# Altium PCB AT32.PcbDoc (part 1 of 9)
Units mm, origin at the board's own origin, x right, y up, seen from the top; angles counter-clockwise.
Board outline 152.1 x 84.6 mm, 2 copper layers (Top Layer, Bottom Layer); 49 components, 58 nets, 223 pads, 0 vias.
Unrouted connection lines stored in the file: 3.
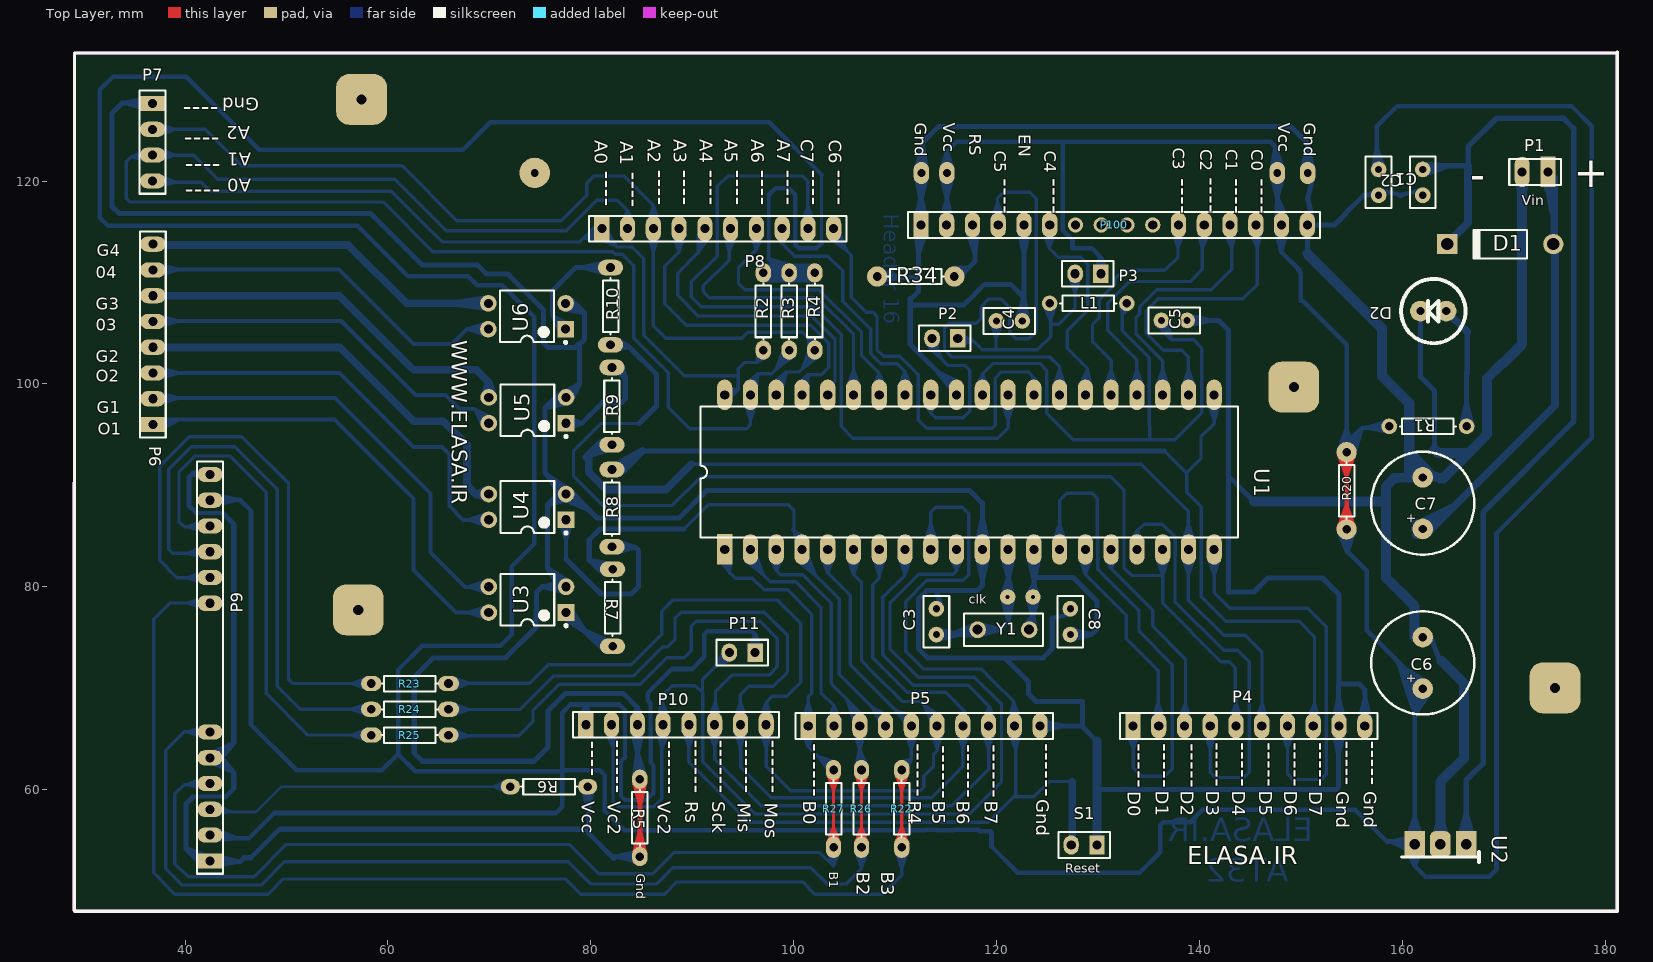
[diagram p0: Top Layer view]
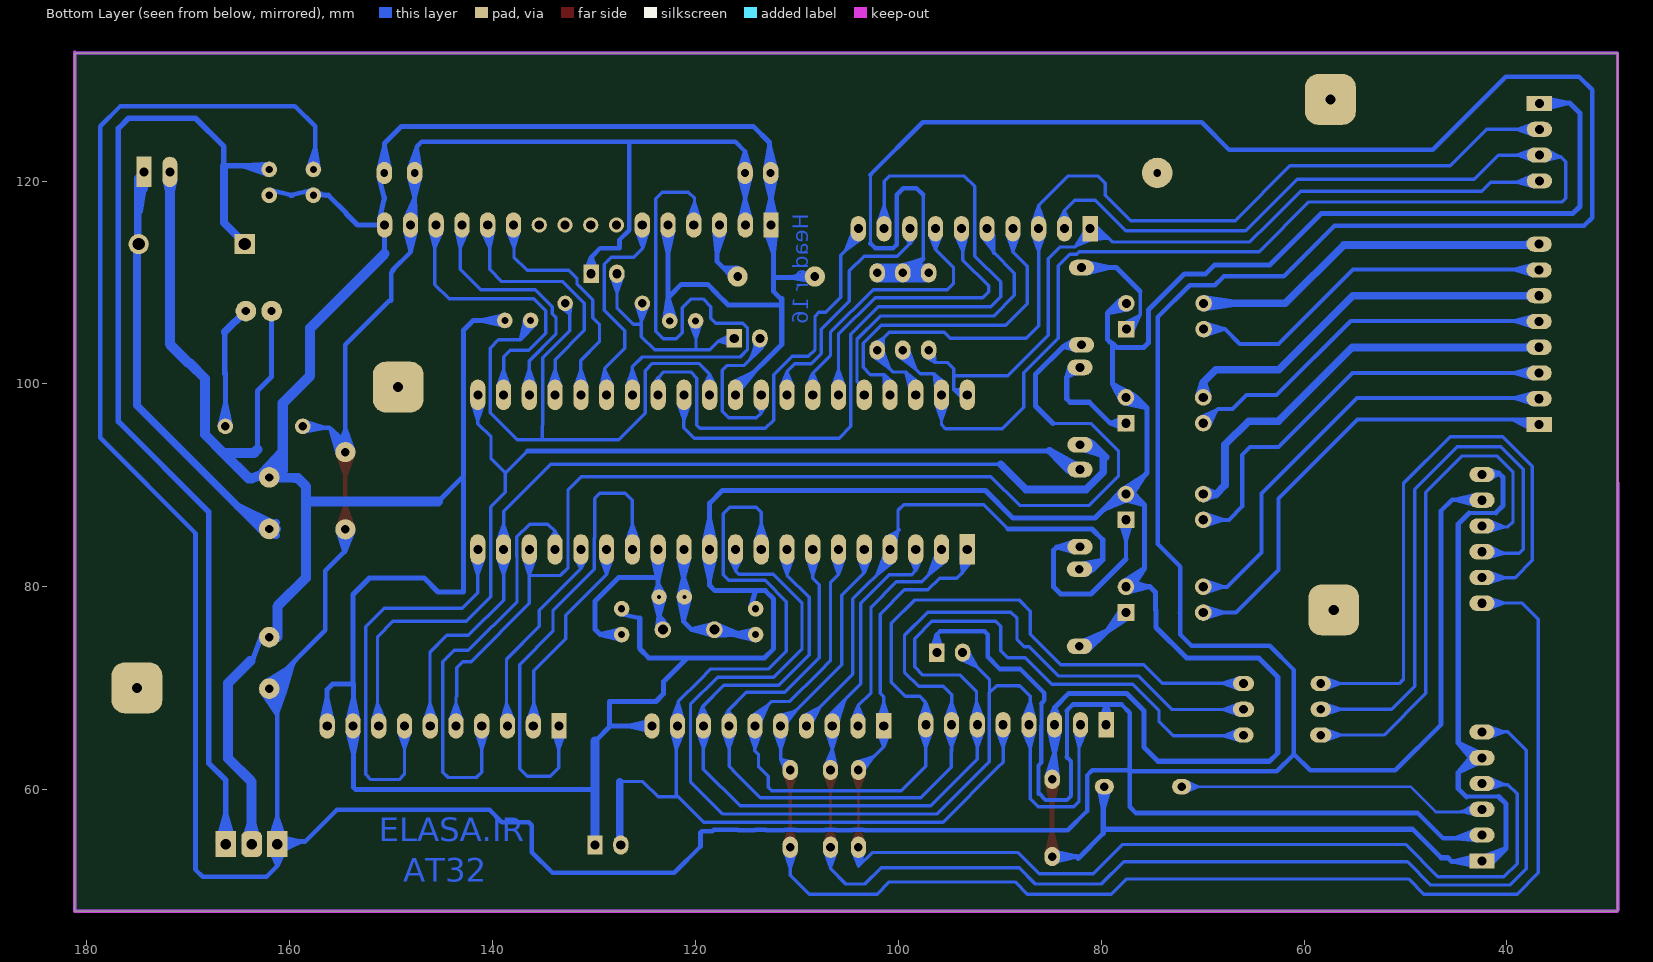
[diagram p1: Bottom Layer view, seen from below]

## Layer stack, top to bottom
Top Layer: signal copper 0.0356
Dielectric: core 0.32, FR-4, Dk 4.8
Bottom Layer: signal copper 0.0356

## Board outline
181.1,132.6 181.2,132.5 181.2,48 29.2,48 29.1,48.1 29.1,132.6 181.1,132.6

## Design rules (kind name [scope] priority, off if disabled: settings)
Clearance [All] p1: gap=0.27
PolygonConnect [All] p1: connectstyle=Relief reliefconductorwidth=0.254 reliefentries=4 polygonreliefangle="90 Angle"
RoomDefinition AT32 [InComponentClass('AT32')] p1: confinementstyle=ConfineIn formatcopy=TRUE lockcomponents=FALSE outline 0,23 50.8,23 50.8,38.1 0,38.1
RoutingLayers [All] p1: top layer_v5=FALSE bottom layer_v5=TRUE
RoutingVias [All] p1: holewidth=0.711 width=1.5 viastyle="Through Hole" minholewidth=0.711 minwidth=1 maxholewidth=0.711 maxwidth=5
SilkscreenOverComponentPads [All] p1: minsilkscreentomaskgap=0.254
SolderMaskExpansion [All] p1: expansion=0.102
Width [InNet('GND')] p1: maxlimit=1 minlimit=0.3 preferedwidth=0.5
26 further rules are at their usual default settings.

## Components (designator, comment, footprint, x,y, rotation, side; value= is the part's Value field where it differs from the comment)
C1 "Cap" RAD-0.1 157.672,119.876 r90 top
C2 "Cap" RAD-0.1 162.028,119.876 r90 top
C3 "Cap" RAD-0.1 114.076,76.565 r90 top
C4 "Cap" RAD-0.1 121.268,106.212 r0 top
C5 "Cap" RAD-0.1 137.524,106.26 r180 top
C6 "Cap Pol1" CE10 162.028,72.496 r90 top
C7 "Cap Pol1" CE10 162.028,88.244 r90 top
C8 "Cap" RAD-0.1 127.284,76.565 r90 top
D1 "Diode 1N4007" DIO10.46-5.3x2.8 169.672,113.792 r180 top
D2 "LED0" LED5 163.068,107.188 r180 top
L1 "Inductor" AXIAL-0.3#1 129.047,107.944 r0 top
P1 "Header 2" HDR1X2#1 174.368,120.908 r180 top
P2 "Header 2" HDR1X2#2 116.188,104.499 r180 top
P3 "Header 2" HDR1X2#2 130.29,110.865 r180 top
P4 "Header 10" HDR1X10 133.456,66.286 r0 top
P5 "Header 10" HDR1X10 101.446,66.286 r0 top
P6 "Header 8" HDR1X8 36.827,96.004 r90 top
P7 "Header 4" HDR1X4 36.8,127.644 r270 top
P8 "Header 10" HDR1X10 81.091,115.31 r0 top
P9 "Header 16" HDR1X16#1 42.46,52.98 r90 top
P10 "Header 8" HDR1X8 79.515,66.406 r0 top
P11 "Header 2" HDR1X2#2 96.204,73.512 r180 top
P100 "Header 16" HDR1X16#2 112.552,115.676 r0 top
R1 "Res1" AXIAL-0.3#1 162.539,95.815 r180 top
R2 "Res1" AXIAL-0.3#2 97.016,107.147 r90 top
R3 "Res1" AXIAL-0.3#2 99.556,107.147 r90 top
R4 "Res1" AXIAL-0.3#2 102.096,107.147 r90 top
R5 "Res1" AXIAL-0.3#2 84.844,57.212 r270 top
R6 "Res1" AXIAL-0.3#2 75.884,60.304 r0 top
R7 "Res1" AXIAL-0.3#3 82.152,77.936 r90 top
R8 "Res1" AXIAL-0.3#3 82.092,87.756 r270 top
R9 "Res1" AXIAL-0.3#3 82.092,97.816 r90 top
R10 "Res1" AXIAL-0.3#3 81.952,107.668 r90 top
R20 "Res1" AXIAL-0.3#4 154.519,89.475 r90 top
R22 "Res1" AXIAL-0.3#5 110.66,58.128 r90 top
R23 "Res1" AXIAL-0.3#5 62.168,70.464 r180 top
R24 "Res1" AXIAL-0.3#5 62.168,67.924 r180 top
R25 "Res1" AXIAL-0.3#5 62.168,65.384 r0 top
R26 "Res1" AXIAL-0.3#5 106.688,58.128 r90 top
R27 "Res1" AXIAL-0.3#5 103.94,58.128 r90 top
R34 "Res1" AXIAL-0.3#4 112.044,110.596 r180 top
S1 "SW-PB" HDR1X2#3 129.908,54.548 r180 top
U1 "ATmega32L-8PI" 40P6 117.336,91.307 r0 top
U2 "LM78M05CT" LM78XX 163.768,54.632 r180 top
U3 "Optoisolator1" DIP-4 73.752,78.734 r180 top
U4 "Optoisolator1" DIP-4 73.752,87.878 r180 top
U5 "Optoisolator1" DIP-4 73.752,97.403 r180 top
U6 "Optoisolator1" DIP-4 73.712,106.674 r180 top
Y1 "XTAL" CAPR5.08-7.8x3.2 120.68,75.776 r0 top

## Footprints (in the part's own frame and the unit in brackets; to place one, negate y for a bottom-side part, rotate by r counter-clockwise, add the part's x,y. Pads: shape width x height; smd on the part's side, far side on the other; paste and mask are expansions set on the pad)
40P6 [mm] "DIP; 40 Leads; Row Spacing 15.24 mm; Pitch 2.54 mm"
  rect 1.5x3 hole 0.9: 1(-24.13,-7.62)
  oval 1.5x3 hole 0.9: 2(-21.59,-7.62) 3(-19.05,-7.62) 4(-16.51,-7.62) 5(-13.97,-7.62) 6(-11.43,-7.62) 7(-8.89,-7.62) 8(-6.35,-7.62) 9(-3.81,-7.62) 10(-1.27,-7.62) 11(1.27,-7.62) 12(3.81,-7.62) 13(6.35,-7.62) 14(8.89,-7.62) 15(11.43,-7.62) 16(13.97,-7.62) 17(16.51,-7.62) 18(19.05,-7.62) 19(21.59,-7.62) 20(24.13,-7.62) 21(24.13,7.62) 22(21.59,7.62) 23(19.05,7.62) 24(16.51,7.62) 25(13.97,7.62) 26(11.43,7.62) 27(8.89,7.62) 28(6.35,7.62) 29(3.81,7.62) 30(1.27,7.62) 31(-1.27,7.62) 32(-3.81,7.62) 33(-6.35,7.62) 34(-8.89,7.62) 35(-11.43,7.62) 36(-13.97,7.62) 37(-16.51,7.62) 38(-19.05,7.62) 39(-21.59,7.62) 40(-24.13,7.62)
  silkscreen extent -26.5,-6.45 26.5,6.45
AXIAL-0.3#1 [mm]
  round 1.54 hole 0.85: 1(-3.81,0) 2(3.81,0)
  silkscreen extent -2.77,-0.76 2.77,0.76
AXIAL-0.3#2 [mm] "Axial Device, Thru-Hole; 2 Leads; 0.3 in Pin Spacing"
  oval 1.9x1.54 hole 0.85: 1(-3.81,0) 2(3.81,0)
  silkscreen extent -2.77,-0.76 2.77,0.76
AXIAL-0.3#3 [mm] "Axial Device, Thru-Hole; 2 Leads; 0.3 in Pin Spacing"
  oval 1.54x2.5 hole 0.85: 1(-3.81,0) 2(3.81,0)
  silkscreen extent -2.77,-0.76 2.77,0.76
AXIAL-0.3#4 [mm] "Axial Device, Thru-Hole; 2 Leads; 0.3 in Pin Spacing"
  round 2 hole 0.85: 1(-3.81,0) 2(3.81,0)
  silkscreen extent -2.77,-0.76 2.77,0.76
AXIAL-0.3#5 [mm] "Axial Device, Thru-Hole; 2 Leads; 0.3 in Pin Spacing"
  oval 2.1x1.5 hole 0.85: 1(-3.81,0)
  oval 2x1.5 hole 0.85: 2(3.81,0)
  silkscreen extent -2.77,-0.76 2.77,0.76
CAPR5.08-7.8x3.2 [mm] "Capacitor, Ceramic, Thru-Hole, Dipped Radial; Body 7.8 x 3.2 mm (WxT) Pin Spacing 5.08 mm (typ)"
  round 1.65 hole 1: 1(-2.54,0) 2(2.54,0)
  silkscreen extent -3.9,-1.6 3.9,1.6
CE10 [mil]
  round 80 hole 32: 1(-100,0) 2(100,0)
  silkscreen extent -200,-200 200,200
DIO10.46-5.3x2.8 [mm] "Diode, Axial; Body 5.2 x 2.7 mm (LxDia. max), Lead Dia. 0.86 mm (max)"
  round 2 hole 1.2: 1(-5.23,0)
  rect 2x2 hole 1.2: 2(5.23,0)
  silkscreen extent -2.65,-1.41 2.74,1.4
DIP-4 [mm] "DIP; 4 Leads; Row Spacing 7.62 mm; Pitch 2.54 mm"
  rect 1.64x1.64 hole 0.9: 1(-3.81,1.27)
  round 1.64 hole 0.9: 2(-3.81,-1.27) 3(3.81,-1.27) 4(3.81,1.27)
  silkscreen extent -3.94,-2.55 2.65,2.69
HDR1X2#1 [mm] "Connector; Header; 2 Position"
  rect 1.5x3 hole 0.9: 1(0,0)
  oval 1.5x3 hole 0.9: 2(2.54,0)
  silkscreen extent -1.27,-1.27 3.81,1.27
HDR1X2#2 [mm] "Connector; Header; 2 Position"
  rect 1.54x1.8 hole 0.9: 1(0,0)
  oval 1.54x1.8 hole 0.9: 2(2.54,0)
  silkscreen extent -1.27,-1.27 3.81,1.27
HDR1X2#3 [mm]
  rect 1.5x1.9 hole 0.9: 1(0,0)
  oval 1.5x1.9 hole 0.9: 2(2.54,0)
  silkscreen extent -1.27,-1.27 3.81,1.27
HDR1X4 [mm] "Connector; Header; 4 Position"
  rect 1.5x2.5 hole 0.9: 1(0,0)
  oval 1.5x2.5 hole 0.9: 2(2.54,0) 3(5.08,0) 4(7.62,0)
  silkscreen extent -1.27,-1.27 8.89,1.27
HDR1X8 [mm] "Connector; Header; 8 Position"
  rect 1.5x2.5 hole 0.9: 1(0,0)
  oval 1.5x2.5 hole 0.9: 2(2.54,0) 3(5.08,0) 4(7.62,0) 5(10.16,0) 6(12.7,0) 7(15.24,0) 8(17.78,0)
  silkscreen extent -1.27,-1.27 19.05,1.27
HDR1X10 [mm] "Connector; Header; 10 Position"
  rect 1.5x2.5 hole 0.9: 1(0,0)
  oval 1.5x2.5 hole 0.9: 2(2.54,0) 3(5.08,0) 4(7.62,0) 5(10.16,0) 6(12.7,0) 7(15.24,0) 8(17.78,0) 9(20.32,0) 10(22.86,0)
  silkscreen extent -1.27,-1.27 24.13,1.27
HDR1X16#1 [mm] "Connector; Header; 16 Position"
  rect 1.5x2.5 hole 0.9: 1(0,0)
  oval 1.5x2.5 hole 0.9: 2(2.54,0) 3(5.08,0) 4(7.62,0) 5(10.16,0) 6(12.7,0) 11(25.4,0) 12(27.94,0) 13(30.48,0) 14(33.02,0) 15(35.56,0) 16(38.1,0)
  round 0 all layers, no hole: 7(15.24,0) 8(17.78,0) 9(20.32,0) 10(22.86,0)
  silkscreen extent -1.27,-1.27 39.37,1.27
HDR1X16#2 [mm] "Connector; Header; 16 Position"
  rect 1.5x2.5 hole 0.9: 1(0,0)
  oval 1.5x2.5 hole 0.9: 2(2.54,0) 3(5.08,0) 4(7.62,0) 5(10.16,0) 6(12.7,0) 11(25.4,0) 12(27.94,0) 13(30.48,0) 14(33.02,0) 15(35.56,0) 16(38.1,0)
  round 1.5 hole 0.9: 7(15.24,0) 8(17.78,0) 9(20.32,0) 10(22.86,0)
  silkscreen extent -1.27,-1.27 39.37,1.27
LED5 [mil]
  round 80 hole 32: 1(-50,0) 2(50,0)
  silkscreen extent -125,-125 125,125
LM78XX [mil]
  rect 80x100 hole 40: 1(-100,0) 3(100,0)
  rrect50% 80x100 hole 40: 2(0,0)
  silkscreen extent -150,30 150,70
RAD-0.1 [mm]
  round 1.54 hole 0.7: 1(-1.27,0) 2(1.27,0)
  silkscreen extent -2.54,-1.27 2.54,1.27

## Part data
C1 C2 C3 C4 C5 C8: "Capacitor"
C6 C7: "Polarized Capacitor (Radial)"
D1: "1 Amp General Purpose Rectifier"
D2: "Typical INFRARED GaAs LED"
P1 P2 P3 P11: "Header, 2-Pin"
P4 P5 P8: "Header, 10-Pin"
P6 P10: "Header, 8-Pin"
P7: "Header, 4-Pin"
P9 P100: "Header, 16-Pin"
R1 R2 R3 R4 R5 R6 R7 R8 R9 R10 R20 R22 R23 R24 R25 R26 R27 R34: "Resistor"
S1: "Switch"
U1: "8-Bit AVR Microcontroller with 32K Bytes of In-System Programmable Flash Memory"
U2: "3-Terminal Positive Voltage Regulators"
U3 U4 U5 U6: "4-Pin Phototransistor Optocoupler"
Y1: "Crystal Oscillator"

## Free pads (board coordinates)
  round 3 hole 0.762 paste+0: 0(74.475,120.808)
  round 1.524 hole 0.4: 0(121.1,79) 1(123.6,79)
  oval 1.524x2.2 hole 0.762: 0(150.68,120.8) 1(147.697,120.8) 9(115.12,120.8) 10(112.6,120.8)
  round 0.1 all layers, no hole paste+0: 0(181.2,83.8)
  rrect50% 5x5 hole 1: 2(57.073,77.715) 2(57.403,128.052) 2(149.32,99.695) 2(175.07,70.033)

## Nets (pads, with @x,y where several pads share a name; then routed paths per layer and width w, separated by ;. In a path a pad name is that pad's centre, name@x,y a point inside that pad or via, vN(x,y) a via of type N, cw(c..) or ccw(c..) an arc to the next point about the centre after c; other vN are vias at no path point)
GND: C1.1 C2.1 C3.2 C4.2 C5.1 C6.2 C7.2 C8.2 D2.2 P1.2 P4.9 P4.10 P5.10 P7.1 P9.1 P9.5 P9.16 P10.3 P100.1 P100.5 P100.16 pad.0@150.68,120.8 pad.10 R5.1 R5.2 R6.2 R34.2 S1.1 U1.11 U1.31 U2.2 U3.2 U4.2 U5.2 U6.2 | length 2147.9
  Top Layer w0.5: R5.2@84.476,53.95 ccw(c83.589,54.837) 84.844,54.837 ccw(c86.099,54.837) R5.2@85.212,53.95 ; R5.1@84.476,60.474 cw(c83.589,59.587) 84.844,59.587 cw(c86.099,59.587) R5.1@85.212,60.474 ; R5.2@84.844,53.444 R5.1@84.844,61.022 ; R5.2@84.327,53.642 84.844,55.852 ; R5.2@84.327,53.642 84.844,55.852 ; R5.2@84.327,53.642 84.844,55.852 ; R5.2@84.327,53.642 84.844,55.852 ; R5.2@84.327,53.642 84.844,55.852 ; R5.1@84.327,60.782 84.844,58.572 ; R5.1@84.327,60.782 84.844,58.572 ; R5.1@84.327,60.782 84.844,58.572 ; R5.1@84.327,60.782 84.844,58.572 ; R5.1@84.327,60.782 84.844,58.572 ; R5.2@84.844,53.582 84.844,55.852 ; R5.2@84.844,53.582 84.844,55.852 ; R5.2@84.844,53.582 84.844,55.852 ; R5.2@84.844,53.582 84.844,55.852 ; R5.2@84.844,53.582 84.844,55.852 ; 84.844,55.852 R5.2@85.361,53.642 ; 84.844,55.852 R5.2@85.361,53.642 ; 84.844,55.852 R5.2@85.361,53.642 ; 84.844,55.852 R5.2@85.361,53.642 ; 84.844,55.852 R5.2@85.361,53.642 ; 84.844,58.572 R5.1@85.361,60.782 ; 84.844,58.572 R5.1@84.844,60.842 ; 84.844,58.572 R5.1@85.361,60.782 ; 84.844,58.572 R5.1@84.844,60.842 ; 84.844,58.572 R5.1@85.361,60.782 ; 84.844,58.572 R5.1@84.844,60.842 ; 84.844,58.572 R5.1@85.361,60.782 ; 84.844,58.572 R5.1@84.844,60.842 ; 84.844,58.572 R5.1@85.361,60.782 ; 84.844,58.572 R5.1@84.844,60.842
  Bottom Layer w0.4: 40.824,59.33 43.83,59.33 ; 41.1,87.3 41.104,87.3 ; 41.134,87.27 43.73,87.27
  Bottom Layer w0.5: 34.958,127.7 cw(c34.958,126.302) P7.1@35.946,127.29 ; 35.228,127.7 ccw(c35.228,128.716) P7.1@35.946,127.998 ; P7.1@36.8,127.7 33.8,127.7 32.8,126.7 32.8,117.5 33.5,116.8 58.3,116.8 63.354,111.746 68.815,111.746 69.704,110.857 71.803,110.857 75.36,107.3 75.36,104.04 75.8,103.6 78.5,103.6 78.901,104.001 78.901,100.012 ; 40.42,53.88 ccw(c41.508,54.968) P9.1@41.849,53.468 ; 40.824,59.33 40.1,58.606 40.1,54.2 ; 41.043,91.2 ccw(c41.043,91.997) P9.16@41.606,91.434 ; 41.06,53.24 ccw(c41.745,53.924) P9.1@41.96,52.98 ; 41.1,87.3 40.4,88 40.4,90.8 40.8,91.2 ; P9.16@41.544,90.802 ccw(c40.8,90.305) 40.8,91.2 ; P9.5@42.1,63.2 P9.5@42.16,63.14 ; P9.16@42.2,91.2 40.8,91.2 ; P9.1@42.3,52.9 P9.1@42.4,52.9 ; P9.5@42.612,63.1 42.2,63.1 P9.5@42.16,63.14 ; P9.5@42.612,63.14 P9.5@42.46,63.14 ; P9.5@42.96,62.64 cw(c42.96,60.467) 44.496,62.004 ; P9.5@42.96,63.64 ccw(c42.96,65.765) 44.462,64.262 ; P9.1@43.314,52.626 cw(c43.974,51.966) 43.974,52.9 ; P9.1@43.314,53.334 ccw(c44.36,54.38) 44.36,52.9 ; P9.5@43.35,63.15 44.8,64.6 ; 43.73,87.27 44.8,86.2 44.8,64.6 ; 44,59.3 44.8,60.1 44.8,61.7 ; 74.6,77.7 74.6,76 71.6,73 64.5,73 62.6,71.1 62.6,63.6 63.4,62.8 74.4,62.8 75.8,64.2 75.8,67.8 77.5,69.5 83.2,69.5 84.595,68.105 ; 74.662,77.7 74.662,79.462 75.204,80.004 U3.2@77.562,80.004 ; 75.768,97.908 cw(c77.452,96.223) U5.2@77.559,98.603 ; 76.019,98.159 cw(c76.651,97.526) U5.2@77.208,98.227 ; 76.178,88.518 cw(c77.531,87.165) 77.561,89.078 cw(c77.562,87.243) 78.859,88.541 ; 76.415,98.555 cw(c77.002,97.968) U5.2@77.518,98.618 ; 76.57,98.71 cw(c77.521,97.759) U5.2@77.581,99.103 ; U3.2@76.992,80.004 ccw(c75.616,80.004) 76.589,80.977 ccw(c77.562,81.95) U3.2@77.562,80.574 ; U4.2@76.992,89.148 ccw(c75.616,89.148) 76.589,90.121 ccw(c77.562,91.094) U4.2@77.562,89.718 ; U5.2@77.079,98.371 ccw(c76.533,98.029) 76.533,98.673 ; U5.2@77.079,98.975 cw(c76.533,99.317) 76.533,98.673 ; U3.2@77.159,79.601 ccw(c76.186,78.628) 76.186,80.004 ccw(c76.186,81.38) U3.2@77.159,80.407 ; U4.2@77.286,88.649 79.684,87.65 ; U4.2@77.294,88.645 79.616,87.728 U4.2@77.938,89.577 ; U4.2@77.296,88.644 79.713,87.692 ; U4.2@77.458,89.113 77.547,89.024 78.376,89.024 80.608,86.792 88.717,86.792 91.411,89.486 117.357,89.486 118.606,88.237 U1.11@118.606,83.687 118.606,80.133 118.098,79.624 114.1,79.624 ; U6.2@77.487,108.373 cw(c77.576,107.294) 78.341,108.059 ; U6.2@77.528,107.874 cw(c77.692,105.884) 79.104,107.296 ; U4.2@77.562,88.578 cw(c77.562,85.536) 79.713,87.687 ; U5.2@77.562,99.243 ccw(c77.562,100.619) 78.535,99.646 ccw(c79.508,98.673) U5.2@78.132,98.673 ; U6.2@77.562,107.944 78.456,107.944 ; U6.2@77.568,107.891 cw(c78.037,107.35) 78.543,107.857 ; U6.2@77.896,107.513 cw(c78.39,106.944) 78.923,107.477 ; U4.2@77.931,89.582 79.713,87.692 ; U4.2@77.94,89.575 79.684,87.65 ; U6.2@78.029,107.683 cw(c78.456,107.464) 78.456,107.944 ; U6.2@78.029,108.205 ccw(c78.456,108.424) 78.456,107.944 ; 79.09,104.09 79.4,104.4 79.4,107 ; R6.2@79.506,59.936 cw(c78.797,59.227) 79.8,59.227 ; 79.8,58.87 cw(c81.308,58.87) R6.2@80.242,59.936 ; R6.2@79.8,60.26 79.8,56.1 ; 82.3,53.2 79.8,55.7 79.8,56.1 ; 82.402,53.402 R5.2@84.844,53.402 ; P10.3@84.241,65.552 cw(c83.388,64.699) 84.595,64.699 cw(c85.802,64.699) P10.3@84.949,65.552 ; P10.3@84.243,67.261 ccw(c83.408,68.105) 84.595,68.105 ; R5.1@84.324,61.206 84.6,63.465 ; R5.2@84.476,53.034 ccw(c83.589,52.147) 83.589,53.402 ccw(c83.589,54.657) R5.2@84.476,53.77 ; 84.595,63.059 ccw(c86.701,63.059) R5.1@85.212,61.57 ; P10.3@84.947,67.261 cw(c85.782,68.105) 84.595,68.105 ; R5.1@85,61.1 84.595,61.505 P10.3@84.595,66.406 84.595,68.105 ; R5.1@85.351,61.316 84.6,63.465 ; R34.2@108.2,110.5 112.3,110.5 ; 111.5,107.6 111.5,108.3 ; 111.5,108.4 111.5,108.3 ; P100.1@112.198,116.53 ccw(c111.277,117.451) 112.58,117.451 ; pad.10@112.238,120.1 cw(c111.412,119.274) 112.58,119.274 ; P100.1@112.5,115.6 112.3,115.4 112.3,110.5 ; P100.1@112.58,115.31 pad.10@112.58,120.8 ; 112.58,117.316 ccw(c113.692,117.316) P100.1@112.906,116.53 ; 112.58,119.178 cw(c113.884,119.178) pad.10@112.962,120.1 ; pad.10@112.6,120.8 112.7,120.9 112.7,123.8 114.3,125.4 149,125.4 150.68,123.72 pad.0@150.68,120.8 ; P100.1@113.04,115.066 112.303,112.931 ; C3.2@114.591,77.903 114.1,79.624 ; 114.627,100.773 ccw(c116.066,102.212) U1.31@116.066,100.177 ; U1.31@115.713,99.323 114.369,101.013 ; U1.31@116.066,98.927 116.066,99.867 115.533,99.867 111.502,103.898 111.502,107.8 116.8,107.8 117.9,108.9 117.9,108.92 118.8,109.82 121.4,109.82 122.52,108.7 ; U1.31@116.328,100.103 114.369,101.013 ; U1.11@118.252,82.583 cw(c117.399,81.73) 118.606,81.73 cw(c119.813,81.73) U1.11@118.96,82.583 ; U1.11@118.252,84.791 ccw(c117.399,85.644) 118.606,85.644 ccw(c119.813,85.644) U1.11@118.96,84.791 ; C4.2@122.027,106.31 122.71,108.478 C4.2@123.058,106.232 ; C4.2@122.17,106.58 ccw(c120.863,107.887) 122.712,107.887 ; P100.5@122.358,114.822 cw(c121.505,113.969) 122.712,113.969 cw(c123.919,113.969) P100.5@123.066,114.822 ; C4.2@122.5,106.2 C4.2@122.525,106.225 ; C4.2@122.52,106.23 C4.2@122.525,106.225 ; 122.712,107.047 ccw(c123.373,107.047) C4.2@122.906,106.58 ; P100.5@122.712,115.676 122.712,106.412 C4.2@122.525,106.225 ; 123.15,69.45 123.15,70.65 120.8,73 ; 123.2,69.4 123.9,68.7 128.5,68.7 128.5,66.386 ; P5.10@124.6,66.58 P5.10@124.306,66.286 ; P5.10@124.66,65.933 cw(c125.513,65.079) 125.513,66.286 cw(c125.513,67.493) P5.10@124.66,66.64 ; 125.48,73.868 124.612,73 120.8,73 ; 125.5,74 125.5,76.9 C8.2@127.464,77.347 ; 129.9,64.786 128.4,66.286 P5.10@124.306,66.286 ; 130.008,60 153.5,60 153.74,60.24 153.74,70.4 ; C5.1@139.162,105.892 cw(c140.049,105.005) 140.049,106.26 cw(c140.049,107.515) C5.1@139.162,106.628 ; 142.876,90.574 142.876,79.5 145.4,79.5 146.76,80.86 152.149,80.86 153.776,79.233 153.776,70.4 155.8,70.4 156.316,69.884 P4.10@156.316,66.842 ; 142.876,90.9 142.876,105.295 141.911,106.26 C5.1@138.794,106.26 ; 143.051,90.749 145.4,88.4 ; pad.0@150.318,121.5 ccw(c149.444,122.374) 150.68,122.374 ccw(c151.916,122.374) pad.0@151.042,121.5 ; 150.652,112.926 P100.16@150.652,115.176 ; P100.16@150.68,115.676 153.339,115.676 154.468,116.805 ; 150.68,118.2 pad.0@151.189,120.404 ; 150.68,118.426 P100.16@151.15,116.225 ; P4.9@153.422,65.432 cw(c152.656,64.666) 153.74,64.666 ; P4.9@153.422,67.14 ccw(c152.656,67.906) 153.74,67.906 ; 153.74,64.492 cw(c155.07,64.492) P4.9@154.13,65.432 ; 153.74,68.08 ccw(c155.07,68.08) P4.9@154.13,67.14 ; 154.4,116.8 156.206,118.606 ; P4.10@155.962,67.14 ccw(c155.109,67.993) 156.316,67.993 ccw(c157.523,67.993) P4.10@156.67,67.14 ; 156.417,118.606 ccw(c156.417,119.861) C1.1@157.304,118.974 ; C1.1@157.732,119.123 159.942,118.606 ; 159.758,118.606 C2.1@161.968,119.123 ; D2.2@161.798,107.188 161.798,100.702 163.2,99.3 163.2,93.54 ; C6.2@162.702,75.4 163.683,72.777 ; U2.2@163.226,55.428 ccw(c161.919,56.735) 163.768,56.735 ccw(c165.617,56.735) U2.2@164.31,55.428 ; P1.2@171.474,119.804 cw(c170.621,118.951) 171.828,118.951 cw(c173.035,118.951) P1.2@172.182,119.804 ; 34.05,127.7 P7.1@36.232,127.149 ; 34.05,127.7 P7.1@36.257,128.142 ; 34.05,127.7 P7.1@36.3,127.644 ; 34.05,127.7 P7.1@36.232,127.149 ; 34.05,127.7 P7.1@36.257,128.142 ; 34.05,127.7 P7.1@36.3,127.644 ; 34.05,127.7 P7.1@36.232,127.149 ; 34.05,127.7 P7.1@36.257,128.142 ; 34.05,127.7 P7.1@36.3,127.644 ; 34.05,127.7 P7.1@36.232,127.149 ; 34.05,127.7 P7.1@36.257,128.142 ; 34.05,127.7 P7.1@36.3,127.644 ; 34.05,127.7 P7.1@36.232,127.149 ; 34.05,127.7 P7.1@36.257,128.142 ; 34.05,127.7 P7.1@36.3,127.644 ; 40.1,54.2 41.32,52.98 42.32,52.98 P9.1@42.4,52.9 ; 40.1,54.2 P9.1@41.641,52.595 ; 40.1,54.2 P9.1@42.186,53.426 ; 40.1,54.2 P9.1@41.96,52.98 ; 40.1,54.2 P9.1@41.641,52.595 ; 40.1,54.2 P9.1@42.186,53.426 ; 40.1,54.2 P9.1@41.96,52.98 ; 40.1,54.2 P9.1@41.641,52.595 ; 40.1,54.2 P9.1@42.186,53.426 ; 40.1,54.2 P9.1@41.96,52.98 ; 40.1,54.2 P9.1@41.641,52.595 ; 40.1,54.2 P9.1@42.186,53.426 ; 40.1,54.2 P9.1@41.96,52.98 ; 40.1,54.2 P9.1@41.641,52.595 ; 40.1,54.2 P9.1@42.186,53.426 ; 40.1,54.2 P9.1@41.96,52.98 ; 40.8,91.2 P9.16@41.803,90.605 ; 40.8,91.2 P9.16@41.904,91.577 ; 40.8,91.2 P9.16@41.96,91.08 ; 40.8,91.2 P9.16@41.803,90.605 ; 40.8,91.2 P9.16@41.904,91.577 ; 40.8,91.2 P9.16@41.96,91.08 ; 40.8,91.2 P9.16@41.803,90.605 ; 40.8,91.2 P9.16@41.904,91.577 ; 40.8,91.2 P9.16@41.96,91.08 ; 40.8,91.2 P9.16@41.803,90.605 ; 40.8,91.2 P9.16@41.904,91.577 ; 40.8,91.2 P9.16@41.96,91.08 ; 40.8,91.2 P9.16@41.803,90.605 ; 40.8,91.2 P9.16@41.904,91.577 ; 40.8,91.2 P9.16@41.96,91.08 ; P9.5@42.16,63.14 P9.5@42.46,63.14 ; P9.1@42.4,52.9 45.431,52.9 45.816,53.285 46.485,53.285 49.3,56.1 79.8,56.1 ; P9.5@42.46,63.14 43.36,63.14 44.8,61.7 ; P9.5@42.693,63.563 44.8,64.6 ; P9.5@42.693,63.563 44.8,64.6 ; P9.5@42.693,63.563 44.8,64.6 ; P9.5@42.693,63.563 44.8,64.6 ; P9.5@42.693,63.563 44.8,64.6 ; P9.5@42.696,62.716 44.8,61.7 ; P9.5@42.696,62.716 44.8,61.7 ; P9.5@42.696,62.716 44.8,61.7 ; P9.5@42.696,62.716 44.8,61.7 ; P9.5@42.696,62.716 44.8,61.7 ; P9.1@42.96,52.98 45.211,52.9 ; P9.1@42.96,52.98 45.211,52.9 ; P9.1@42.96,52.98 45.211,52.9 ; P9.1@42.96,52.98 45.211,52.9 ; P9.1@42.96,52.98 45.209,52.9 ; P9.5@42.96,63.14 44.8,64.6 ; P9.5@42.96,63.14 44.8,61.7 ; P9.5@42.96,63.14 44.8,64.6 ; P9.5@42.96,63.14 44.8,61.7 ; P9.5@42.96,63.14 44.8,64.6 ; P9.5@42.96,63.14 44.8,64.6 ; P9.5@42.96,63.14 44.8,64.6 ; P9.5@42.96,63.14 44.8,61.7 ; P9.5@42.96,63.14 44.8,61.7 ; P9.5@42.96,63.14 44.8,61.7 ; P9.1@42.998,52.481 45.211,52.9 ; P9.1@42.998,52.481 45.211,52.9 ; P9.1@42.998,52.481 45.211,52.9 ; P9.1@42.998,52.481 45.211,52.9 ; P9.1@42.998,52.481 45.209,52.9 ; P9.1@43.033,53.475 45.211,52.9 ; P9.1@43.033,53.475 45.211,52.9 ; P9.1@43.033,53.475 45.211,52.9 ; P9.1@43.033,53.475 45.211,52.9 ; P9.1@43.033,53.475 45.209,52.9 ; P9.5@43.309,63.499 44.8,61.7 ; P9.5@43.309,63.499 44.8,61.7 ; P9.5@43.309,63.499 44.8,61.7 ; P9.5@43.309,63.499 44.8,61.7 ; P9.5@43.309,63.499 44.8,61.7 ; P9.5@43.311,62.784 44.8,64.6 ; P9.5@43.311,62.784 44.8,64.6 ; P9.5@43.311,62.784 44.8,64.6 ; P9.5@43.311,62.784 44.8,64.6 ; P9.5@43.311,62.784 44.8,64.6 ; 75.242,80.004 U3.2@77.492,79.438 ; 75.242,80.004 U3.2@77.492,80.57 ; 75.242,80.004 U3.2@77.562,80.004 ; 75.242,80.004 U3.2@77.492,79.438 ; 75.242,80.004 U3.2@77.492,80.57 ; 75.242,80.004 U3.2@77.562,80.004 ; 75.242,80.004 U3.2@77.492,79.438 ; 75.242,80.004 U3.2@77.492,80.57 ; 75.242,80.004 U3.2@77.562,80.004 ; 75.242,80.004 U3.2@77.492,79.438 ; 75.242,80.004 U3.2@77.492,80.57 ; 75.242,80.004 U3.2@77.562,80.004 ; 75.242,80.004 U3.2@77.492,79.438 ; 75.242,80.004 U3.2@77.492,80.57 ; 75.242,80.004 U3.2@77.562,80.004 ; 75.48,97.62 76.533,98.673 ; 75.48,97.62 75.48,91.23 U4.2@77.562,89.148 ; 75.48,97.62 U5.2@77.755,98.137 ; 75.48,97.62 U5.2@77.245,99.146 ; 75.48,97.62 U5.2@77.562,98.673 ; 75.48,97.62 U5.2@77.755,98.137 ; 75.48,97.62 U5.2@77.245,99.146 ; 75.48,97.62 U5.2@77.562,98.673 ; 75.48,97.62 U5.2@77.755,98.137 ; 75.48,97.62 U5.2@77.245,99.146 ; 75.48,97.62 U5.2@77.562,98.673 ; 75.48,97.62 U5.2@77.755,98.137 ; 75.48,97.62 U5.2@77.245,99.146 ; 75.48,97.62 U5.2@77.562,98.673 ; 75.48,97.62 U5.2@77.755,98.137 ; 75.48,97.62 U5.2@77.245,99.146 ; 75.681,91.029 U4.2@77.118,88.79 ; 75.681,91.029 U4.2@77.92,89.592 ; 75.681,91.029 U4.2@77.118,88.79 ; 75.681,91.029 U4.2@77.92,89.592 ; 75.681,91.029 U4.2@77.118,88.79 ; 75.681,91.029 U4.2@77.92,89.592 ; 75.681,91.029 U4.2@77.562,89.148 ; 75.681,91.029 U4.2@77.118,88.79 ; 75.681,91.029 U4.2@77.92,89.592 ; 75.681,91.029 U4.2@77.562,89.148 ; 75.72,81.846 75.72,88.06 ; 75.72,81.846 U3.2@77.562,80.004 ; 75.72,81.846 U3.2@77.117,79.647 ; 75.72,81.846 U3.2@77.919,80.449 ; 75.72,81.846 U3.2@77.562,80.004 ; 75.72,81.846 U3.2@77.117,79.647 ; 75.72,81.846 U3.2@77.919,80.449 ; 75.72,81.846 U3.2@77.562,80.004 ; 75.72,81.846 U3.2@77.117,79.647 ; 75.72,81.846 U3.2@77.919,80.449 ; 75.72,81.846 U3.2@77.562,80.004 ; 75.72,81.846 U3.2@77.117,79.647 ; 75.72,81.846 U3.2@77.919,80.449 ; 75.72,81.846 U3.2@77.562,80.004 ; 75.72,81.846 U3.2@77.117,79.647 ; 75.72,81.846 U3.2@77.919,80.449 ; 75.72,81.846 U3.2@77.562,80.004 ; 75.72,88.06 76.808,89.148 U4.2@77.562,89.148 ; 75.72,88.06 U4.2@77.784,88.623 ; 75.72,88.06 U4.2@77.209,89.596 ; 75.72,88.06 U4.2@77.562,89.148 ; 75.72,88.06 U4.2@77.784,88.623 ; 75.72,88.06 U4.2@77.209,89.596 ; 75.72,88.06 U4.2@77.562,89.148 ; 75.72,88.06 U4.2@77.784,88.623 ; 75.72,88.06 U4.2@77.209,89.596 ; 75.72,88.06 U4.2@77.562,89.148 ; 75.72,88.06 U4.2@77.784,88.623 ; 75.72,88.06 U4.2@77.209,89.596 ; 75.72,88.06 U4.2@77.784,88.623 ; 75.72,88.06 U4.2@77.209,89.596 ; 75.72,88.06 U4.2@77.562,89.148 ; 76.533,98.673 U5.2@77.562,98.673 ; 76.533,98.673 U5.2@77.404,98.125 ; 76.533,98.673 U5.2@77.404,99.221 ; 76.533,98.673 U5.2@77.404,98.125 ; 76.533,98.673 U5.2@77.404,99.221 ; 76.533,98.673 U5.2@77.562,98.673 ; 76.533,98.673 U5.2@77.404,98.125 ; 76.533,98.673 U5.2@77.404,99.221 ; 76.533,98.673 U5.2@77.404,98.125 ; 76.533,98.673 U5.2@77.404,99.221 ; 76.533,98.673 U5.2@77.562,98.673 ; 76.533,98.673 U5.2@77.404,98.125 ; 76.533,98.673 U5.2@77.404,99.221 ; 76.533,98.673 U5.2@77.562,98.673 ; 76.533,98.673 U5.2@77.404,98.125 ; 76.533,98.673 U5.2@77.404,99.221 ; 76.533,98.673 U5.2@77.404,98.125 ; 76.533,98.673 U5.2@77.404,99.221 ; 76.533,98.673 U5.2@77.562,98.673 ; 76.533,98.673 U5.2@77.404,98.125 ; 76.533,98.673 U5.2@77.404,99.221 ; 76.533,98.673 U5.2@77.562,98.673 ; 76.533,98.673 U5.2@77.404,98.125 ; 76.533,98.673 U5.2@77.404,99.221 ; 76.533,98.673 U5.2@77.562,98.673 ; U5.2@77.224,99.132 78.901,100.012 ; U5.2@77.224,99.132 78.901,100.012 ; U5.2@77.224,99.132 78.901,100.012 ; U5.2@77.224,99.132 78.901,100.012 ; U6.2@77.337,107.405 79.4,107 ; U6.2@77.337,107.405 79.4,107 ; U6.2@77.337,107.405 79.4,107 ; U6.2@77.337,107.405 79.4,107 ; U6.2@77.337,107.405 79.4,107 ; U6.2@77.522,107.944 78.456,107.944 ; U6.2@77.522,107.944 79.4,107 ; U6.2@77.522,107.944 78.456,107.944 ; U6.2@77.522,107.944 78.456,107.944 ; U6.2@77.522,107.944 78.456,107.944 ; U6.2@77.522,107.944 78.456,107.944 ; U6.2@77.522,107.944 78.456,107.944 ; U6.2@77.522,107.944 78.456,107.944 ; U6.2@77.522,107.944 79.4,107 ; U6.2@77.522,107.944 78.456,107.944 ; U6.2@77.522,107.944 79.4,107 ; U6.2@77.522,107.944 79.4,107 ; U4.2@77.562,89.148 79.797,87.603 ; U4.2@77.562,89.148 79.797,87.603 ; U4.2@77.562,89.148 79.684,87.65 ; U4.2@77.562,89.148 79.713,87.692 ; U5.2@77.562,98.673 78.901,100.012 ; U5.2@77.562,98.673 78.901,100.012 ; U5.2@77.562,98.673 78.901,100.012 ; U6.2@77.696,107.401 78.456,107.944 ; U6.2@77.696,107.401 78.456,107.944 ; U6.2@77.696,107.401 78.456,107.944 ; U6.2@77.696,107.401 78.456,107.944 ; U6.2@77.696,107.401 78.456,107.944 ; U6.2@77.696,107.401 78.456,107.944 ; U6.2@77.696,107.401 78.456,107.944 ; U6.2@77.696,107.401 78.456,107.944 ; U6.2@77.696,107.401 78.456,107.944 ; U6.2@77.696,107.401 78.456,107.944 ; U6.2@77.696,108.487 78.456,107.944 ; U6.2@77.696,108.487 78.456,107.944 ; U6.2@77.696,108.487 78.456,107.944 ; U6.2@77.696,108.487 78.456,107.944 ; U6.2@77.696,108.487 78.456,107.944 ; U6.2@77.696,108.487 78.456,107.944 ; U6.2@77.696,108.487 78.456,107.944 ; U6.2@77.696,108.487 78.456,107.944 ; U6.2@77.696,108.487 78.456,107.944 ; U6.2@77.696,108.487 78.456,107.944 ; U6.2@77.845,108.414 79.4,107 ; U6.2@77.845,108.414 79.4,107 ; U6.2@77.845,108.414 79.4,107 ; U6.2@77.845,108.414 79.4,107 ; U6.2@77.845,108.414 79.4,107 ; U5.2@78.021,98.335 78.901,100.012 ; U5.2@78.021,98.335 78.901,100.012 ; U5.2@78.021,98.335 78.901,100.012 ; U5.2@78.021,98.335 78.901,100.012 ; 78.456,107.944 79.4,107 ; R6.2@79.181,60.221 79.8,58.029 ; R6.2@79.181,60.221 79.8,58.029 ; R6.2@79.181,60.22 79.8,58.036 R6.2@80.213,60.269 ; R6.2@79.181,60.221 79.8,58.029 ; R6.2@79.181,60.221 79.8,58.029 ; R6.2@79.694,60.304 79.8,58.029 ; R6.2@79.694,60.304 79.8,58.029 ; R6.2@79.694,60.304 79.8,58.029 ; R6.2@79.694,60.304 79.8,58.029 ; 79.797,87.603 77.934,89.58 79.797,87.603 ; 79.797,87.603 77.289,88.648 79.797,87.603 ; 79.8,58.029 R6.2@80.213,60.269 ; 79.8,58.029 R6.2@80.213,60.269 ; 79.8,58.029 R6.2@80.213,60.269 ; 79.8,58.029 R6.2@80.213,60.269 ; 82.574,53.402 R5.2@84.784,52.885 ; 82.574,53.402 R5.2@84.784,53.919 ; 82.574,53.402 R5.2@84.784,52.885 ; 82.574,53.402 R5.2@84.784,53.919 ; 82.574,53.402 R5.2@84.784,52.885 ; 82.574,53.402 R5.2@84.784,53.919 ; 82.574,53.402 R5.2@84.844,53.402 ; 82.574,53.402 R5.2@84.784,52.885 ; 82.574,53.402 R5.2@84.784,53.919 ; 82.574,53.402 R5.2@84.844,53.402 ; P10.3@84.098,65.85 84.595,63.656 ; P10.3@84.098,65.85 84.595,63.656 ; P10.3@84.098,65.85 84.595,63.656 ; P10.3@84.098,65.85 84.595,63.656 ; P10.3@84.098,65.85 84.595,63.656 ; P10.3@84.106,67.01 84.595,68.105 ; P10.3@84.106,67.01 84.595,68.105 ; P10.3@84.106,67.01 84.595,68.105 ; P10.3@84.106,67.01 84.595,68.105 ; P10.3@84.106,67.01 84.595,68.105 ; R5.1@84.324,61.205 84.595,63.515 ; R5.1@84.324,61.205 84.595,63.515 ; R5.1@84.324,61.205 84.595,63.515 ; R5.1@84.324,61.205 84.595,63.515 ; 84.595,63.515 R5.1@85.352,61.315 ; 84.595,63.515 R5.1@84.844,61.202 ; 84.595,63.515 R5.1@85.352,61.315 ; 84.595,63.515 R5.1@84.844,61.202 ; 84.595,63.515 R5.1@85.352,61.315 ; 84.595,63.515 R5.1@84.844,61.202 ; 84.595,63.515 R5.1@85.352,61.315 ; 84.595,63.515 R5.1@84.844,61.202 ; 84.595,63.656 P10.3@85.092,65.85 ; 84.595,63.656 P10.3@84.595,65.906 ; 84.595,63.656 P10.3@85.092,65.85 ; 84.595,63.656 P10.3@84.595,65.906 ; 84.595,63.656 P10.3@85.092,65.85 ; 84.595,63.656 P10.3@84.595,65.906 ; 84.595,63.656 P10.3@85.092,65.85 ; 84.595,63.656 P10.3@84.595,65.906 ; 84.595,63.656 P10.3@85.092,65.85 ; 84.595,63.656 P10.3@84.595,65.906 ; P10.3@84.595,66.906 84.595,68.105 ; P10.3@84.595,66.906 84.595,68.105 ; P10.3@84.595,66.906 84.595,68.105 ; P10.3@84.595,66.906 84.595,68.105 ; P10.3@84.595,66.906 84.595,68.105 ; 84.595,68.105 P10.3@85.084,67.01 ; 84.595,68.105 P10.3@85.084,67.01 ; 84.595,68.105 P10.3@85.084,67.01 ; 84.595,68.105 P10.3@85.084,67.01 ; 84.595,68.105 P10.3@85.084,67.01 ; 84.6,63.465 R5.1@84.844,61.202 ; R34.2@108.234,110.596 110.488,110.5 ; R34.2@108.234,110.596 110.488,110.5 ; R34.2@108.234,110.596 110.488,110.5 ; R34.2@108.234,110.596 110.488,110.5 ; R34.2@108.268,110.097 110.488,110.5 ; R34.2@108.268,110.097 110.488,110.5 ; R34.2@108.268,110.097 110.483,110.5 R34.2@108.311,111.09 ; R34.2@108.268,110.097 110.488,110.5 ; R34.2@108.268,110.097 110.488,110.5 ; R34.2@108.311,111.09 110.488,110.5 ; R34.2@108.311,111.09 110.488,110.5 ; R34.2@108.311,111.09 110.488,110.5 ; R34.2@108.311,111.09 110.488,110.5 ; 111.5,108.3 112.3,109.1 112.3,110.5 ; P100.1@112.052,115.176 112.3,112.907 ; P100.1@112.052,115.176 112.3,112.907 ; P100.1@112.052,115.176 112.3,112.907 ; P100.1@112.052,115.176 112.303,112.931 ; P100.1@112.052,115.176 112.3,112.907 ; P100.1@112.056,116.238 112.58,118.426 ; P100.1@112.056,116.238 112.58,118.426 ; P100.1@112.056,116.238 112.58,118.426 ; P100.1@112.056,116.238 112.58,118.426 ; P100.1@112.056,116.238 112.58,118.426 ; pad.10@112.091,120.409 112.58,118.2 ; pad.10@112.091,120.409 112.58,118.2 ; pad.10@112.091,120.409 112.58,118.2 ; pad.10@112.091,120.409 112.58,118.2 ; pad.10@112.091,120.409 112.58,118.2 ; pad.10@112.094,121.218 112.7,123.402 ; pad.10@112.094,121.218 112.7,123.402 ; pad.10@112.094,121.218 112.7,123.402 ; pad.10@112.094,121.218 112.7,123.399 ; pad.10@112.094,121.218 112.7,123.402 ; 112.3,112.907 P100.1@113.04,115.067 ; 112.3,112.907 P100.1@112.552,115.176 ; 112.3,112.907 P100.1@113.04,115.067 ; 112.3,112.907 P100.1@112.552,115.176 ; 112.3,112.907 P100.1@113.04,115.067 ; 112.3,112.907 P100.1@112.552,115.176 ; 112.3,112.907 P100.1@113.04,115.067 ; 112.3,112.907 P100.1@112.552,115.176 ; 112.303,112.931 P100.1@112.552,115.176 ; P100.1@112.552,116.176 112.58,118.426 ; P100.1@112.552,116.176 112.58,118.426 ; P100.1@112.552,116.176 112.58,118.426 ; P100.1@112.552,116.176 112.58,118.426 ; P100.1@112.552,116.176 112.58,118.426 ; 112.58,118.2 pad.10@113.108,120.4 ; 112.58,118.2 pad.10@112.6,120.462 ; 112.58,118.2 pad.10@113.108,120.4 ; 112.58,118.2 pad.10@112.6,120.462 ; 112.58,118.2 pad.10@113.108,120.4 ; 112.58,118.2 pad.10@112.6,120.462 ; 112.58,118.2 pad.10@113.108,120.4 ; 112.58,118.2 pad.10@112.6,120.462 ; 112.58,118.2 pad.10@113.108,120.4 ; 112.58,118.2 pad.10@112.6,120.462 ; 112.58,118.426 P100.1@113.05,116.225 ; 112.58,118.426 P100.1@113.05,116.225 ; 112.58,118.426 P100.1@113.05,116.225 ; 112.58,118.426 P100.1@113.05,116.225 ; 112.58,118.426 P100.1@113.05,116.225 ; pad.10@112.6,121.138 112.7,123.402 ; pad.10@112.6,121.138 112.7,123.402 ; pad.10@112.6,121.138 112.7,123.402 ; pad.10@112.6,121.138 112.7,123.399 ; pad.10@112.6,121.138 112.7,123.402 ; 112.7,123.399 pad.10@113.111,121.173 ; 112.7,123.402 pad.10@113.111,121.173 ; 112.7,123.402 pad.10@113.111,121.173 ; 112.7,123.402 pad.10@113.111,121.173 ; 112.7,123.402 pad.10@113.111,121.173 ; 114.1,79.624 113.124,79.624 112.3,78.8 112.3,73.9 113.2,73 120.8,73 ; 114.296,101.104 U1.31@115.711,99.325 ; 114.296,101.104 U1.31@116.335,100.098 ; 114.296,101.104 U1.31@116.066,99.677 ; 114.296,101.104 U1.31@115.711,99.325 ; 114.296,101.104 U1.31@116.335,100.098 ; 114.296,101.104 U1.31@116.066,99.677 ; 114.296,101.104 U1.31@115.711,99.325 ; 114.296,101.104 U1.31@116.335,100.098 ; 114.296,101.104 U1.31@116.066,99.677 ; 114.299,101.101 U1.31@115.711,99.325 ; 114.299,101.101 U1.31@116.335,100.098 ; 114.299,101.101 U1.31@116.066,99.677 ; 114.369,101.013 U1.31@116.066,99.677 ; U1.11@118.109,82.881 118.606,80.687 ; U1.11@118.109,82.881 118.606,80.687 ; U1.11@118.109,82.881 118.606,80.687 ; U1.11@118.109,82.881 118.606,80.687 ; U1.11@118.109,82.881 118.606,80.687 ; U1.11@118.109,84.493 118.606,86.687 ; U1.11@118.109,84.493 118.606,86.687 ; U1.11@118.109,84.493 118.606,86.687 ; U1.11@118.109,84.493 118.606,86.687 ; U1.11@118.109,84.493 118.606,86.687 ; 118.606,80.687 U1.11@119.103,82.881 ; 118.606,80.687 U1.11@118.606,82.937 ; 118.606,80.687 U1.11@119.103,82.881 ; 118.606,80.687 U1.11@118.606,82.937 ; 118.606,80.687 U1.11@119.103,82.881 ; 118.606,80.687 U1.11@118.606,82.937 ; 118.606,80.687 U1.11@119.103,82.881 ; 118.606,80.687 U1.11@118.606,82.937 ; 118.606,80.687 U1.11@119.103,82.881 ; 118.606,80.687 U1.11@118.606,82.937 ; U1.11@118.606,84.437 118.606,86.687 ; U1.11@118.606,84.437 118.606,86.687 ; U1.11@118.606,84.437 118.606,86.687 ; U1.11@118.606,84.437 118.606,86.687 ; U1.11@118.606,84.437 118.606,86.687 ; 118.606,86.687 U1.11@119.103,84.493 ; 118.606,86.687 U1.11@119.103,84.493 ; 118.606,86.687 U1.11@119.103,84.493 ; 118.606,86.687 U1.11@119.103,84.493 ; 118.606,86.687 U1.11@119.103,84.493 ; C4.2@122.027,106.31 122.712,108.504 ; C4.2@122.027,106.31 122.712,108.504 ; C4.2@122.027,106.31 122.712,108.504 ; C4.2@122.027,106.31 122.712,108.504 ; P100.5@122.215,115.12 122.712,112.926 ; P100.5@122.215,115.12 122.712,112.926 ; P100.5@122.215,115.12 122.712,112.926 ; P100.5@122.215,115.12 122.712,112.926 ; P100.5@122.215,115.12 122.712,112.926 ; C4.2@122.525,106.225 C4.2@122.538,106.212 ; C4.2@122.538,106.212 122.712,108.504 ; C4.2@122.538,106.212 122.712,108.504 ; C4.2@122.538,106.212 122.712,108.504 ; C4.2@122.538,106.212 122.712,108.504 ; 122.712,108.504 C4.2@123.058,106.232 ; 122.712,108.504 C4.2@123.058,106.232 ; 122.712,108.504 C4.2@123.058,106.232 ; 122.712,108.504 C4.2@123.058,106.232 ; 122.712,112.926 P100.5@123.209,115.12 ; 122.712,112.926 P100.5@122.712,115.176 ; 122.712,112.926 P100.5@123.209,115.12 ; 122.712,112.926 P100.5@122.712,115.176 ; 122.712,112.926 P100.5@123.209,115.12 ; 122.712,112.926 P100.5@122.712,115.176 ; 122.712,112.926 P100.5@123.209,115.12 ; 122.712,112.926 P100.5@122.712,115.176 ; 122.712,112.926 P100.5@123.209,115.12 ; 122.712,112.926 P100.5@122.712,115.176 ; P5.10@124.306,66.286 126.556,66.286 ; P5.10@124.306,66.286 126.556,66.286 ; P5.10@124.362,65.789 126.556,66.286 ; P5.10@124.362,65.789 126.556,66.286 ; P5.10@124.362,65.789 126.556,66.286 ; P5.10@124.362,65.789 126.556,66.286 ; P5.10@124.362,66.783 126.556,66.286 ; P5.10@124.362,66.783 126.556,66.286 ; P5.10@124.362,66.783 126.556,66.286 ; P5.10@124.362,66.783 126.556,66.286 ; C5.1@138.794,106.26 141.064,106.26 ; C5.1@138.794,106.26 141.064,106.26 ; C5.1@138.854,105.743 141.064,106.26 ; C5.1@138.854,105.743 141.064,106.26 ; C5.1@138.854,105.743 141.064,106.26 ; C5.1@138.854,105.743 141.064,106.26 ; C5.1@138.854,106.777 141.064,106.26 ; C5.1@138.854,106.777 141.064,106.26 ; C5.1@138.854,106.777 141.064,106.26 ; C5.1@138.854,106.777 141.064,106.26 ; pad.0@150.171,121.196 150.68,123.4 ; pad.0@150.171,121.196 150.68,123.4 ; pad.0@150.171,121.196 150.68,123.4 ; pad.0@150.171,121.196 150.68,123.4 ; pad.0@150.171,121.196 150.68,123.4 ; pad.0@150.68,121.138 150.68,123.4 ; pad.0@150.68,121.138 150.68,123.4 ; pad.0@150.68,121.138 150.68,123.4 ; pad.0@150.68,121.138 150.68,123.4 ; pad.0@150.68,121.138 150.68,123.4 ; 150.68,123.4 pad.0@151.189,121.196 ; 150.68,123.4 pad.0@151.189,121.196 ; 150.68,123.4 pad.0@151.189,121.196 ; 150.68,123.4 pad.0@151.189,121.196 ; 150.68,123.4 pad.0@151.189,121.196 ; P4.9@153.278,65.738 153.74,63.536 ; P4.9@153.278,65.738 153.74,63.536 ; P4.9@153.278,65.738 153.74,63.536 ; P4.9@153.278,65.738 153.74,63.536 ; P4.9@153.278,65.738 153.74,63.536 ; P4.9@153.278,66.834 153.74,69.036 ; P4.9@153.278,66.834 153.74,69.036 ; P4.9@153.278,66.834 153.74,69.036 ; P4.9@153.278,66.834 153.74,69.036 ; P4.9@153.278,66.834 153.74,69.036 ; 153.74,63.536 P4.9@154.272,65.723 ; 153.74,63.536 P4.9@153.776,65.786 ; 153.74,63.536 P4.9@154.272,65.723 ; 153.74,63.536 P4.9@153.776,65.786 ; 153.74,63.536 P4.9@154.272,65.723 ; 153.74,63.536 P4.9@153.776,65.786 ; 153.74,63.536 P4.9@154.272,65.723 ; 153.74,63.536 P4.9@153.776,65.786 ; 153.74,63.536 P4.9@154.272,65.723 ; 153.74,63.536 P4.9@153.776,65.786 ; 153.74,69.036 P4.9@154.272,66.85 ; 153.74,69.036 P4.9@153.776,66.786 ; 153.74,69.036 P4.9@154.272,66.85 ; 153.74,69.036 P4.9@153.776,66.786 ; 153.74,69.036 P4.9@154.272,66.85 ; 153.74,69.036 P4.9@153.776,66.786 ; 153.74,69.036 P4.9@154.272,66.85 ; 153.74,69.036 P4.9@153.776,66.786 ; 153.74,69.036 P4.9@154.272,66.85 ; 153.74,69.036 P4.9@153.776,66.786 ; P4.10@155.819,66.842 156.316,69.036 ; P4.10@155.819,66.842 156.316,69.036 ; P4.10@155.819,66.842 156.316,69.036 ; P4.10@155.819,66.842 156.316,69.036 ; P4.10@155.819,66.842 156.316,69.036 ; P4.10@156.316,66.786 156.316,69.036 ; P4.10@156.316,66.786 156.316,69.036 ; P4.10@156.316,66.786 156.316,69.036 ; P4.10@156.316,66.786 156.316,69.036 ; P4.10@156.316,66.786 156.316,69.036 ; 156.316,69.036 P4.10@156.813,66.842 ; 156.316,69.036 P4.10@156.813,66.842 ; 156.316,69.036 P4.10@156.813,66.842 ; 156.316,69.036 P4.10@156.813,66.842 ; 156.316,69.036 P4.10@156.813,66.842 ; U2.2@163.011,55.003 163.768,57.402 ; U2.2@163.011,55.003 163.768,57.402 ; U2.2@163.011,55.003 163.768,57.402 ; U2.2@163.011,55.003 163.768,57.402 ; U2.2@163.011,55.003 163.768,57.402 ; U2.2@163.011,55.003 163.768,57.402 ; U2.2@163.011,55.003 163.768,57.402 ; U2.2@163.502,54.9 163.768,57.402 ; U2.2@163.502,54.9 163.768,57.402 ; U2.2@163.502,54.9 163.768,57.402 ; U2.2@163.502,54.9 163.768,57.402 ; U2.2@163.502,54.9 163.768,57.402 ; U2.2@163.502,54.9 163.768,57.402 ; U2.2@163.502,54.9 163.768,57.402 ; U2.2@163.768,54.886 163.768,57.402 ; U2.2@163.768,54.886 163.768,57.402 ; U2.2@163.768,54.886 163.768,57.402 ; U2.2@163.768,54.886 163.768,57.402 ; U2.2@163.768,54.886 163.768,57.402 ; U2.2@163.768,54.886 163.768,57.402 ; U2.2@163.768,54.886 163.768,57.402 ; 163.768,57.402 U2.2@164.525,55.003 ; 163.768,57.402 U2.2@164.034,54.9 ; 163.768,57.402 U2.2@164.525,55.003 ; 163.768,57.402 U2.2@164.034,54.9 ; 163.768,57.402 U2.2@164.525,55.003 ; 163.768,57.402 U2.2@164.034,54.9 ; 163.768,57.402 U2.2@164.525,55.003 ; 163.768,57.402 U2.2@164.034,54.9 ; 163.768,57.402 U2.2@164.525,55.003 ; 163.768,57.402 U2.2@164.034,54.9 ; 163.768,57.402 U2.2@164.525,55.003 ; 163.768,57.402 U2.2@164.034,54.9 ; 163.768,57.402 U2.2@164.525,55.003 ; 163.768,57.402 U2.2@164.034,54.9 ; P1.2@171.331,120.102 171.828,117.908 ; P1.2@171.331,120.102 171.828,117.908 ; P1.2@171.331,120.102 171.828,117.908 ; P1.2@171.331,120.102 171.828,117.908 ; P1.2@171.331,120.102 171.828,117.908 ; 171.828,117.908 P1.2@172.325,120.102 ; 171.828,117.908 P1.2@171.828,120.158 ; 171.828,117.908 P1.2@172.325,120.102 ; 171.828,117.908 P1.2@171.828,120.158 ; 171.828,117.908 P1.2@172.325,120.102 ; 171.828,117.908 P1.2@171.828,120.158 ; 171.828,117.908 P1.2@172.325,120.102 ; 171.828,117.908 P1.2@171.828,120.158 ; 171.828,117.908 P1.2@172.325,120.102 ; 171.828,117.908 P1.2@171.828,120.158
  Bottom Layer w0.9: S1.1@129.9,54.6 129.9,64.786
  Bottom Layer w1: 145.4,88.4 158.3,88.4 ; 150.652,112.848 158,105.5 158,100.8 160.7,98.1 160.7,91.5 ; 159.2,90.7 158.4,89.9 158.4,80.9 161.228,78.072 C6.2@161.228,75.036 ; 159.511,90.713 C7.2@162.028,90.784 ; 160.747,93.301 C7.2@162.657,91.221 ; C7.2@161.37,91.537 163.745,90.7 ; 163.2,93.54 163.556,93.184 166.532,93.184 ; U2.2@163.768,54.632 163.768,60.768 166.1,63.1 166.1,70.5 163.908,72.692 ; 164.048,90.7 166.532,93.184 ; 169.819,102.005 168.359,100.545 168.359,95.011 166.532,93.184 ; 169.905,102.005 171.828,103.928 P1.2@171.828,120.908
NetC2_2: C2.2 D1.2 U2.1 | length 182.7
  Bottom Layer w0.55: C2.2@161.989,121.185 cw(c162.749,120.425) 162.749,121.5 ; C2.2@162.009,121.641 164.432,121.484 C2.2@162.147,120.665 ; C2.2@162.1,121.2 162.4,121.5 166.5,121.5 166.5,123.4 169.3,126.2 175.9,126.2 176.9,125.2 176.9,96.3 168,87.4 168,62.625 166.308,60.933 U2.1@166.308,54.632 ; C2.2@162.378,120.796 cw(c164.077,119.097) 164.077,121.5 ; U2.1@165.784,55.41 ccw(c164.519,56.675) 166.308,56.675 ccw(c168.097,56.675) U2.1@166.832,55.41 ; C2.2@162.007,121.641 164.544,121.5 ; C2.2@162.007,121.641 164.544,121.5 ; C2.2@162.007,121.641 164.533,121.5 ; C2.2@162.008,121.641 164.534,121.496 ; C2.2@162.028,121.146 164.544,121.5 ; C2.2@162.028,121.146 164.544,121.5 ; C2.2@162.028,121.146 164.533,121.5 ; C2.2@162.028,121.146 164.534,121.496 ; C2.2@162.144,120.665 164.544,121.5 ; C2.2@162.144,120.665 164.544,121.5 ; C2.2@162.145,120.665 164.533,121.5 ; C2.2@162.144,120.665 164.534,121.496 ; U2.1@165.574,54.989 166.308,57.552 ; U2.1@165.574,54.989 166.308,57.552 ; U2.1@165.574,54.989 166.308,57.552 ; U2.1@165.574,54.989 166.308,57.552 ; U2.1@165.574,54.989 166.308,57.552 ; U2.1@166.308,54.886 166.308,57.552 ; U2.1@166.308,54.886 166.308,57.552 ; U2.1@166.308,54.886 166.308,57.552 ; U2.1@166.308,54.886 166.308,57.552 ; U2.1@166.308,54.886 166.308,57.552 ; 166.308,57.552 U2.1@167.042,54.989 ; 166.308,57.552 U2.1@167.042,54.989 ; 166.308,57.552 U2.1@167.042,54.989 ; 166.308,57.552 U2.1@167.042,54.989 ; 166.308,57.552 U2.1@167.042,54.989
  Bottom Layer w0.8: D1.2@164.4,113.8 166.5,115.9 166.5,121.5
NetC3_1: C3.1 pad.0@121.1,79 U1.12 Y1.1 | length 197.2
  Bottom Layer w0.254: Y1.1@117.659,75.295 Y1.1@118.14,75.776 ; U1.12@121.146,83.687 U1.12@121.2,83.633
  Bottom Layer w0.5: C3.1@114.444,74.927 cw(c115.331,74.039) 115.331,75.295 cw(c115.331,76.55) C3.1@114.444,75.662 ; 115.59,75.295 ccw(c115.59,78.326) Y1.1@117.733,76.183 ; 116.797,75.295 ccw(c116.797,77.119) Y1.1@118.087,75.829 ; Y1.1@117.659,75.295 C3.1@114.076,75.295 ; Y1.1@117.97,76.325 115.716,75.327 ; Y1.1@118.186,75.203 115.723,75.292 ; Y1.1@118.547,75.369 cw(c119.528,74.388) 119.528,75.776 cw(c119.528,77.164) Y1.1@118.547,76.183 ; pad.0@120.594,78.92 121.2,76.739 pad.0@121.611,78.965 ; pad.0@120.738,78.638 cw(c119.622,77.523) 121.2,77.523 ; pad.0@120.738,79.362 ccw(c119.622,80.478) 121.2,80.478 ; U1.12@120.792,82.583 cw(c119.808,81.599) 121.2,81.599 ; 121.2,78.005 cw(c122.095,78.005) pad.0@121.462,78.638 ; 121.2,79.995 ccw(c122.095,79.995) pad.0@121.462,79.362 ; 121.2,81.86 cw(c122.223,81.86) U1.12@121.5,82.583 ; U1.12@121.2,83.633 121.2,80.9 ; C3.1@114.076,75.295 116.346,75.295 ; C3.1@114.076,75.295 116.346,75.295 ; C3.1@114.136,74.778 116.346,75.295 ; C3.1@114.136,74.778 116.346,75.295 ; C3.1@114.136,74.778 116.346,75.295 ; C3.1@114.136,74.778 116.346,75.295 ; C3.1@114.136,75.811 116.346,75.295 ; C3.1@114.136,75.811 116.346,75.295 ; C3.1@114.136,75.811 116.346,75.295 ; C3.1@114.136,75.811 116.346,75.295 ; 115.644,75.295 118.184,75.203 115.644,75.295 ; 115.644,75.295 117.968,76.325 115.644,75.295 ; 115.644,75.295 Y1.1@118.14,75.776 ; 115.644,75.295 Y1.1@118.14,75.776 ; 115.716,75.327 118.178,75.202 115.842,75.333 117.963,76.323 115.723,75.292 ; 115.716,75.327 Y1.1@118.14,75.776 ; 115.723,75.292 Y1.1@118.14,75.776 ; Y1.1@118.14,75.776 120.376,75.776 ; Y1.1@118.14,75.776 120.376,75.776 ; Y1.1@118.14,75.776 120.376,75.776 ; Y1.1@118.214,75.206 120.376,75.776 ; Y1.1@118.214,75.206 120.376,75.776 ; Y1.1@118.214,75.206 120.376,75.776 ; Y1.1@118.214,75.206 120.376,75.776 ; Y1.1@118.214,76.346 120.376,75.776 ; Y1.1@118.214,76.346 120.376,75.776 ; Y1.1@118.214,76.346 120.376,75.776 ; Y1.1@118.214,76.346 120.376,75.776 ; 120.376,75.776 121.2,76.6 121.2,80.9 ; pad.0@120.594,78.92 121.2,76.735 ; pad.0@120.594,78.92 121.2,76.735 ; pad.0@120.594,78.92 121.2,76.735 ; pad.0@120.594,78.92 121.2,76.735 ; pad.0@120.597,79.095 121.2,80.9 ; pad.0@120.597,79.095 121.2,80.9 ; pad.0@120.597,79.095 121.2,80.9 ; pad.0@120.597,79.095 121.2,80.9 ; pad.0@120.597,79.095 121.2,80.9 ; U1.12@120.652,82.863 121.2,80.9 ; U1.12@120.652,82.863 121.2,80.9 ; U1.12@120.652,82.863 121.2,80.9 ; U1.12@120.652,82.863 121.2,80.9 ; U1.12@120.652,82.863 121.2,80.9 ; pad.0@121.1,79 121.2,80.9 ; pad.0@121.1,79 121.2,76.735 ; pad.0@121.1,79 121.2,80.9 ; pad.0@121.1,79 121.2,76.735 ; pad.0@121.1,79 121.2,80.9 ; pad.0@121.1,79 121.2,80.9 ; pad.0@121.1,79 121.2,76.735 ; pad.0@121.1,79 121.2,76.735 ; U1.12@121.146,82.937 121.2,80.9 ; U1.12@121.146,82.937 121.2,80.9 ; U1.12@121.146,82.937 121.2,80.9 ; U1.12@121.146,82.937 121.2,80.9 ; U1.12@121.146,82.937 121.2,80.9 ; 121.2,76.735 pad.0@121.611,78.965 ; 121.2,76.735 pad.0@121.611,78.965 ; 121.2,76.735 pad.0@121.611,78.965 ; 121.2,76.735 pad.0@121.611,78.965 ; 121.2,80.9 U1.12@121.644,82.889 ; 121.2,80.9 pad.0@121.61,79.042 ; 121.2,80.9 U1.12@121.644,82.889 ; 121.2,80.9 U1.12@121.644,82.889 ; 121.2,80.9 U1.12@121.644,82.889 ; 121.2,80.9 U1.12@121.644,82.889 ; 121.2,80.9 pad.0@121.61,79.042 ; 121.2,80.9 pad.0@121.61,79.042 ; 121.2,80.9 pad.0@121.61,79.042 ; 121.2,80.9 pad.0@121.61,79.042